# Altium PCB PCB_D1 mini AHT20 BMP150_2022-06-28.pcbdoc
Units mil, origin at the board's own origin, x right, y up, seen from the top; angles counter-clockwise.
Board outline 2302.5 x 2175 mil, 2 copper layers (Top Layer, Bottom Layer); 17 components, 27 nets, 76 pads, 4 vias.
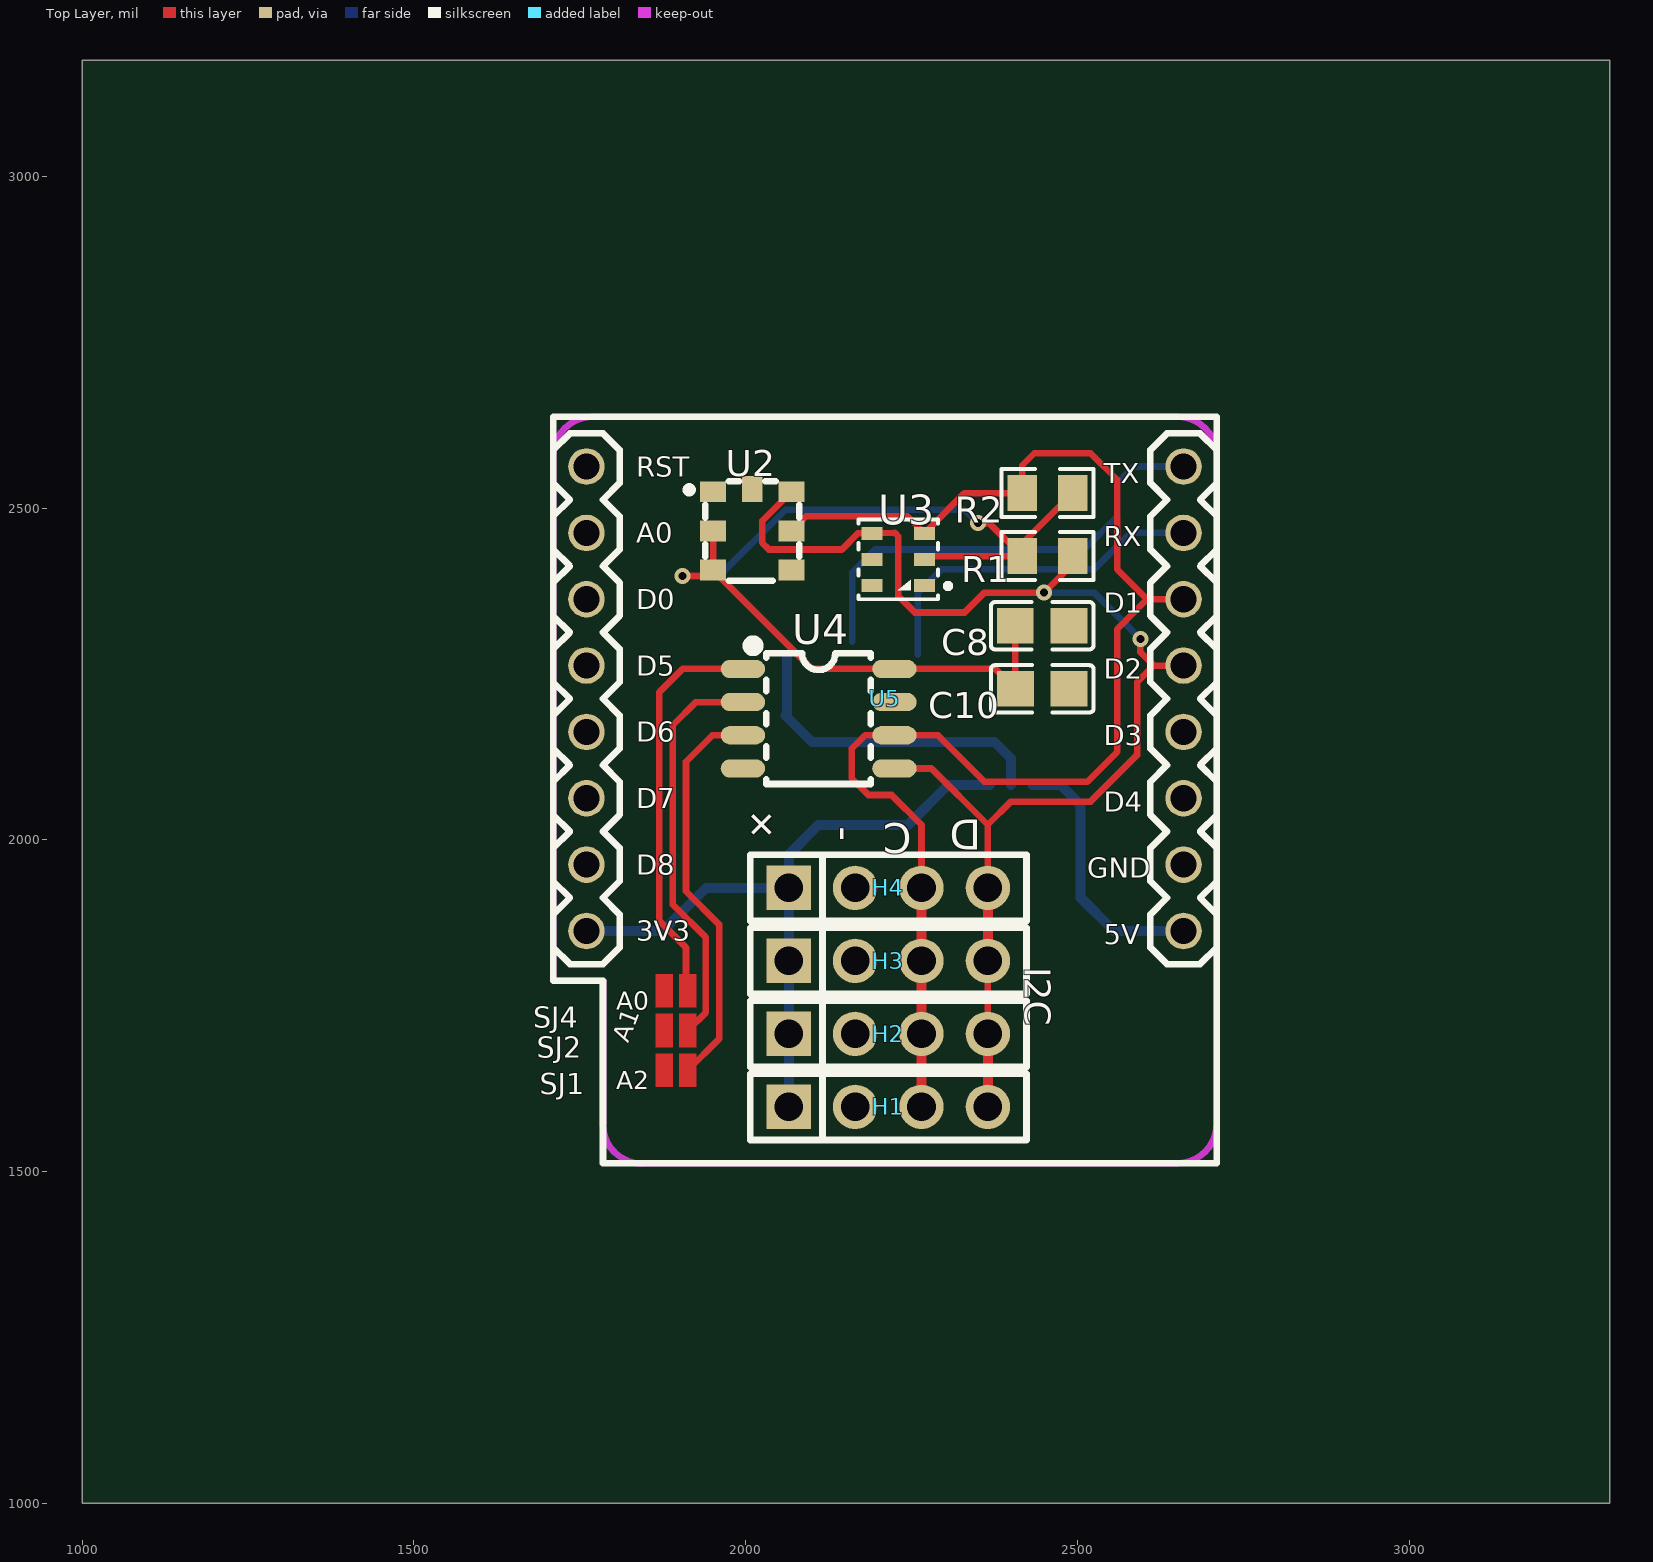
[diagram p0: Top Layer view]
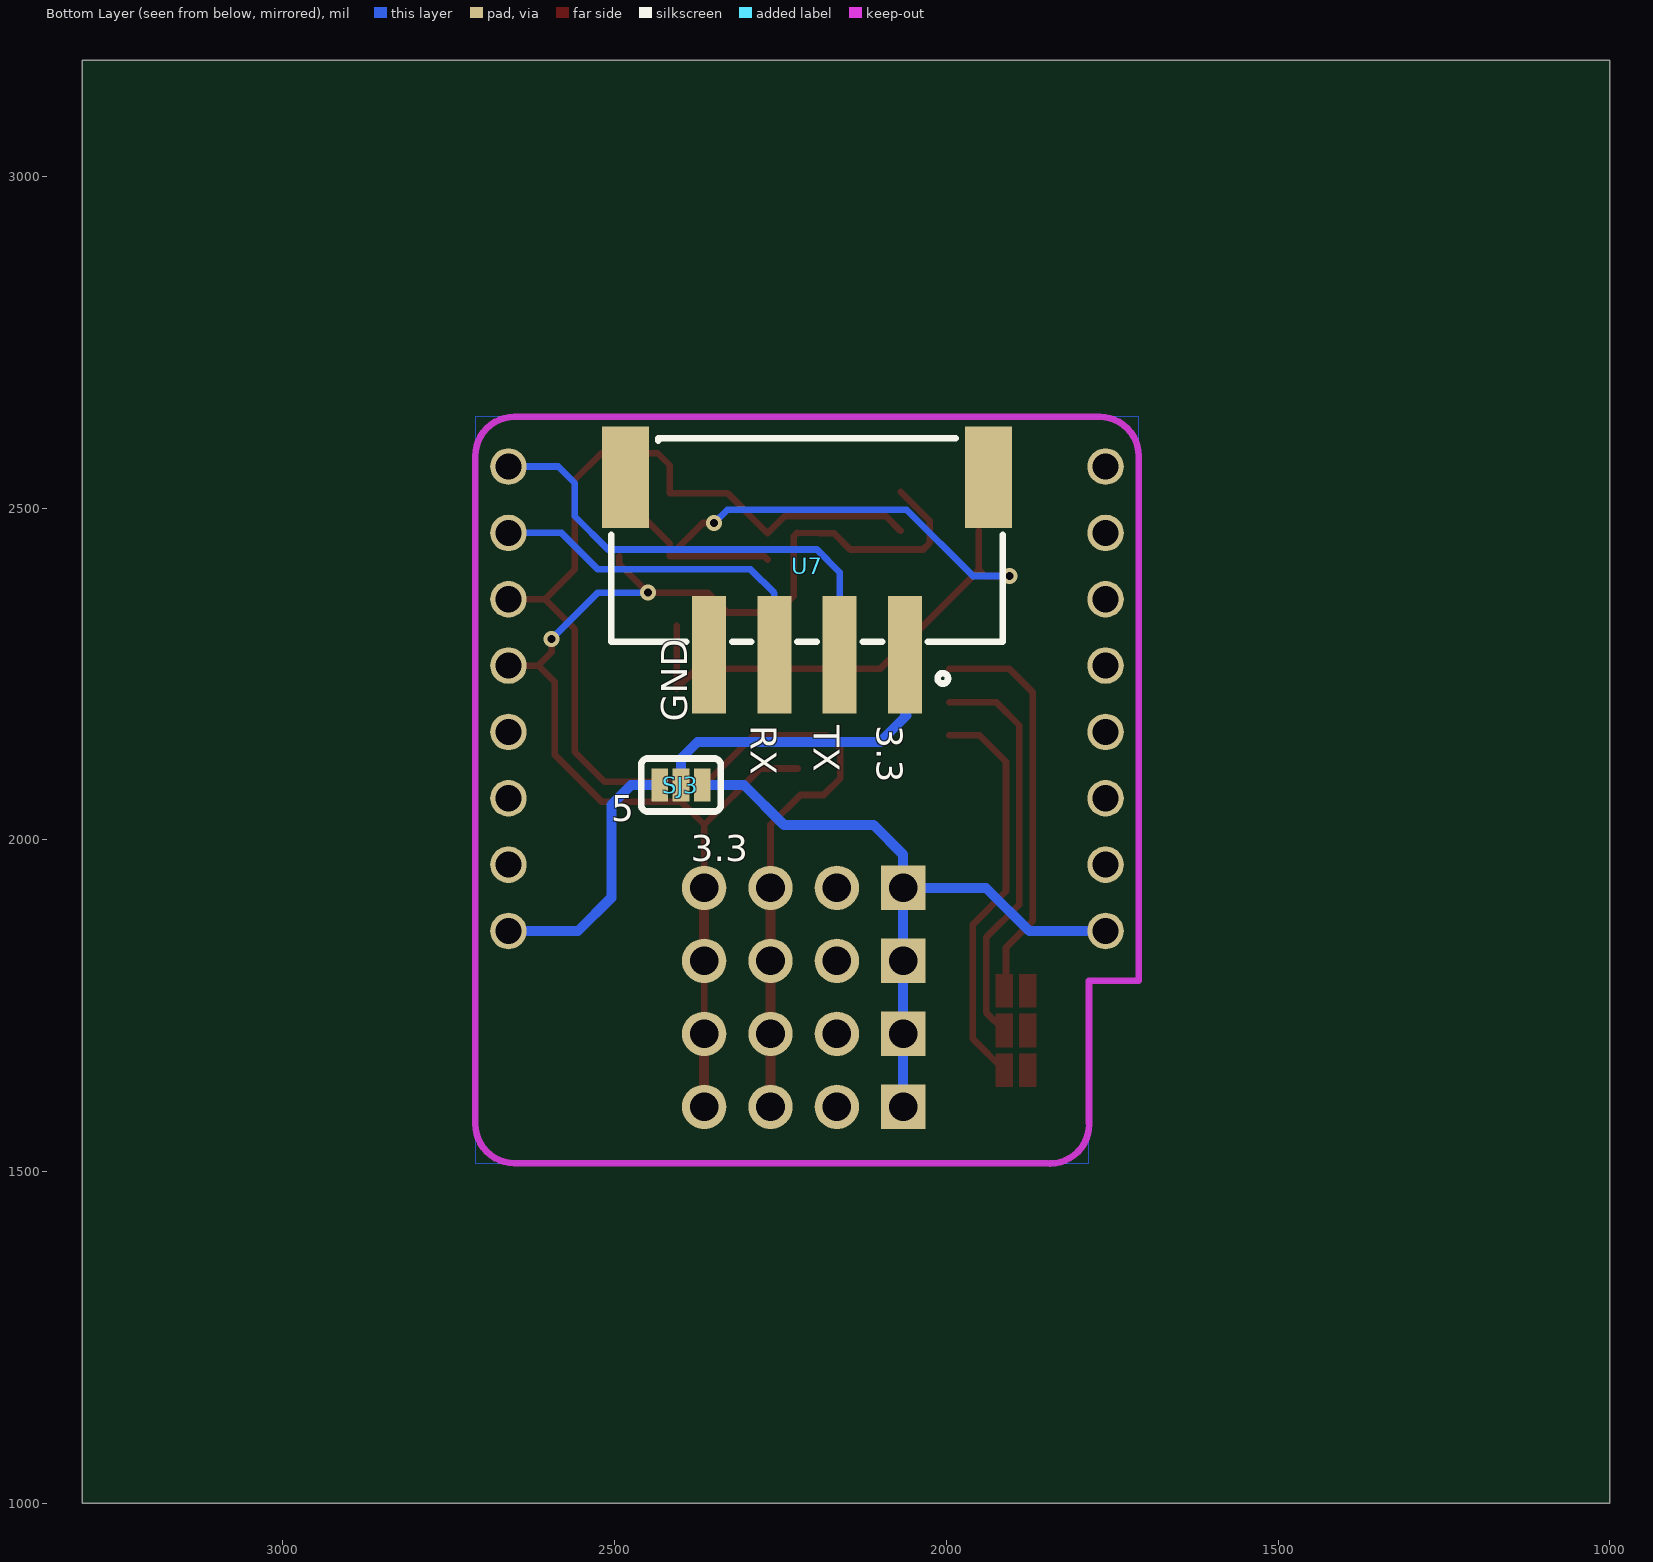
[diagram p1: Bottom Layer view, seen from below]

## Layer stack, top to bottom
Top Layer: signal copper (thickness not stored)
Dielectric: dielectric 12.6, FR-4, Dk 4.8
Bottom Layer: signal copper (thickness not stored)

## Board outline
3302.5,1000 1000,1000 1000,3175 3302.5,3175

## Components (designator, comment, footprint, x,y, rotation, side; value= is the part's Value field where it differs from the comment)
C8 "0.1u" C0805 2447.03,2322.5 r180 top
C10 "0.1u" C0805 2447.03,2227.5 r180 top
H1 "IO_EXT" HDR-TH_4P-P2.54-V-M 2215,1597.5 r0 top
H2 "IO_EXT" HDR-TH_4P-P2.54-V-M 2215,1707.5 r0 top
H3 "IO_EXT" HDR-TH_4P-P2.54-V-M 2215,1817.5 r0 top
H4 "IO_EXT" HDR-TH_4P-P2.54-V-M 2215,1927.5 r0 top
R1 "4.7K" R0805 2455,2427.5 r180 top
R2 "4.7K" R0805 2455,2522.5 r0 top
SJ1 "A2" PAD-JUMPER-2-NO_NO_SILK 1895,1652.5 r0 top
SJ2 "A1" PAD-JUMPER-2-NO_NO_SILK 1895,1712.5 r0 top
SJ3 "5V_IN_Jumpper" PAD-JUMPER-3-NO_YES_SILK 2400,2082.5 r0 bottom
SJ4 "A0" PAD-JUMPER-2-NO_NO_SILK 1895,1772.5 r0 top
U2 "BMP180" LGA-7_L3.8-W3.6-P1.50-BL 2010,2467.5 r270 top
U3 "AHT20_C2757850" SENSOR-SMD_L3.0-W3.0-P1.00-BR 2230,2422.5 r0 top
U4 "AT24C512C-SSHM-T" SOP-8_L5.0-W4.0-P1.27-LS6.2-BL 2110,2182.5 r270 top
U5 "WEMOS-D1-MINI-SHIELD" WEMOS-D1-MINI-SHIELD 2210,2087.5 r0 top
U7 "XH2.54-4PSMD" CONN-SMD_XH2.54-4PSMD 2210,2412.5 r180 bottom

## Footprints (in the part's own frame and the unit in brackets; to place one, negate y for a bottom-side part, rotate by r counter-clockwise, add the part's x,y. Pads: shape width x height; smd on the part's side, far side on the other; paste and mask are expansions set on the pad)
C0805 [mm]
  rect 1.41x1.35 smd: 1(-1.03,0) 2(1.03,0)
  silkscreen extent -1.96,-0.9 1.96,0.9
CONN-SMD_XH2.54-4PSMD [mm]
  rect 1.3x4.5 smd: 1(3.75,-3.4) 2(1.25,-3.4) 3(-1.25,-3.4) 4(-3.75,-3.4)
  rect 1.8x3.9 smd: 5(6.95,3.4) 6(-6.95,3.4)
  silkscreen extent -7.5,-4.5 7.5,4.9
HDR-TH_4P-P2.54-V-M [mm]
  rect 1.7x1.7 hole 1.1: 1(-3.81,0)
  round 1.7 hole 1.1: 2(-1.27,0) 3(1.27,0) 4(3.81,0)
  silkscreen extent -5.29,-1.27 5.29,1.27
LGA-7_L3.8-W3.6-P1.50-BL [mil]
  rect 31.5x39.4 smd: 1(-57,-59) 2(2,-59) 3(61,-59) 4(61,59) 5(2,59) 6(-57,59)
  rect 39.4x31.5 smd: 7(-61,0)
  silkscreen extent -73,-100 77,71
PAD-JUMPER-2-NO_NO_SILK [mil]
  round 0 smd: 1(-17.72,0) 2(17.72,0)
  Top Layer region: -30.22,25 -5.22,25 -5.22,-25 -30.22,-25
  Top Layer region: 5.22,25 30.22,25 30.22,-25 5.22,-25
PAD-JUMPER-3-NO_YES_SILK [mil]
  rect 25x50 smd: 1(32,0) 2(0,0) 3(-32,0)
  silkscreen extent -60,-40 60,40
R0805 [mil]
  rect 44.59x54.21 smd: 1(-38.04,0) 2(38.04,0)
  silkscreen extent -69,-36 69,36
SENSOR-SMD_L3.0-W3.0-P1.00-BR [mm]
  rect 0.8x0.5 smd: 1(1,-1) 2(1,0) 3(1,1) 4(-1,1) 5(-1,0) 6(-1,-1)
  silkscreen extent -1.52,-1.52 2.01,1.52
SOP-8_L5.0-W4.0-P1.27-LS6.2-BL [mm]
  oval 0.7x1.7 smd: 1(-1.905,-2.9) 2(-0.635,-2.9) 3(0.635,-2.9) 4(1.905,-2.9) 5(1.905,2.9) 6(0.635,2.9) 7(-0.635,2.9) 8(-1.905,2.9)
  silkscreen extent -2.99,-2.71 2.5,2
WEMOS-D1-MINI-SHIELD [mil]
  round 55.1 hole 39.4: JP1.1(-450,475) JP1.2(-450,375) JP1.3(-450,275) JP1.4(-450,175) JP1.5(-450,75) JP1.6(-450,-25) JP1.7(-450,-125) JP1.8(-450,-225) JP2.1(450,475) JP2.2(450,375) JP2.3(450,275) JP2.4(450,175) JP2.5(450,75) JP2.6(450,-25) JP2.7(450,-125) JP2.8(450,-225)
  silkscreen extent -500,-575 500,550

## Via types
v1: diameter 24, hole 12, Top Layer to Bottom Layer, tented both sides, 4 vias

## Nets (pads, with @x,y where several pads share a name; then routed paths per layer and width w, separated by ;. In a path a pad name is that pad's centre, name@x,y a point inside that pad or via, vN(x,y) a via of type N, cw(c..) or ccw(c..) an arc to the next point about the centre after c; other vN are vias at no path point)
3.3V: C8.2 C10.2 H1.1 H2.1 H3.1 H4.1 R1.2 R2.2 SJ3.3 U2.2 U2.3 U3.2 U4.8 U5.JP1.8 | length 2645.3
  Top Layer w10: v1(1905,2397.5) 1942,2397.5 U2.3 ; U2.2 U2.3 ; U3.2 2274.37,2427.5 R1.2 ; v1(2350,2477.5) 2366.96,2477.5 R1.2 ; C8.2 C10.2 2376.48,2257.5 U4.8 2100,2257.5 U2.3 ; R2.2 2416.96,2446.42 R1.2
  Bottom Layer w10: v1(1905,2397.5) 1960,2397.5 2060,2497.5 2330,2497.5 v1(2350,2477.5)
  Bottom Layer w15: U5.JP1.8 1875,1862.5 1940,1927.5 H4.1 ; H1.1@2065,1602.5 2065,1712.5 H3.1 H4.1 ; SJ3.3 2305,2082.5 2245,2022.5 2110,2022.5 2065,1977.5 H4.1
A0: SJ4.2 U4.1 | length 608
  Top Layer w10: SJ4.2 1910,1775.22 1910,1837.5 1870,1877.5 1870,2222.5 1905,2257.5 U4.1
A1: SJ2.2 U4.2 | length 612.3
  Top Layer w10: SJ2.2 1940,1739.8 1940,1852.5 1890,1902.5 1890,2172.5 1925,2207.5 U4.2
A2: SJ1.2 U4.3 | length 607.7
  Top Layer w10: SJ1.2 1960,1699.8 1960,1872.5 1910,1922.5 1910,2117.5 1950,2157.5 U4.3
GND: C8.1 C10.1 H1.2 H2.2 H3.2 H4.2 SJ1.1 SJ2.1 SJ4.1 U2.7 U3.5 U4.4 U4.7 U5.JP2.7 U7.4
S$151: 
SCL: H1.3 H2.3 H3.3 H4.3 R2.1 U2.5 U3.3 U4.6 U5.JP2.3 | length 2214.1
  Top Layer w10: U2.5 2091,2487.5 2243.74,2487.5 U3.3 2330,2522.5 R2.1 2416.96,2564.46 2435,2582.5 2520,2582.5 2560,2542.5 2560,2407.5 2605,2362.5 ; U4.6 2290,2157.5 2360,2087.5 2515,2087.5 2560,2132.5 2560,2317.5 2605,2362.5 ; U4.6 2180,2157.5 2160,2137.5 2160,2092.5 2185,2067.5 2220,2067.5 2265,2022.5 H4.3 ; 2605,2362.5 U5.JP2.3 2605,2362.5
  Top Layer w15: H1.3@2265,1602.5 2265,1712.5 H3.3 H4.3
SDA: H1.4 H2.4 H3.4 H4.4 R1.1 U2.6 U3.4 U4.5 U5.JP2.4 | length 2139.3
  Top Layer w10: U2.6 2025,2480.5 2025,2447.5 2035,2437.5 2145,2437.5 2169.37,2461.87 U3.4 ; U3.4 2225,2462.5 2230,2457.5 2230,2367.5 2255,2342.5 2330,2342.5 2360,2372.5 v1(2450,2372.5) 2493.04,2415.54 R1.1 ; U4.5 2280,2107.5 2365,2022.5 ; H2.4@2365,1712.5 H3.4 ; v1(2595,2302.5) 2595,2282.5 2615,2262.5 ; 2365,2022.5 2400,2057.5 2520,2057.5 2590,2127.5 2590,2237.5 2615,2262.5 ; 2365,2022.5 H4.4 2365,2022.5 ; 2615,2262.5 U5.JP2.4 2615,2262.5
  Top Layer w15: H1.4@2365,1602.5 H2.4@2365,1712.5 ; H3.4 H4.4
  Bottom Layer w10: v1(2450,2372.5) 2525,2372.5 v1(2595,2302.5)
U2_1: U2.1
U2_4: U2.4
U3_1: U3.1
U3_6: U3.6
U5_JP1.1: U5.JP1.1
U5_JP1.2: U5.JP1.2
U5_JP1.3: U5.JP1.3
U5_JP1.4: U5.JP1.4
U5_JP1.5: U5.JP1.5
U5_JP1.6: U5.JP1.6
U5_JP1.7: U5.JP1.7
U5_JP2.1: U5.JP2.1 U7.2 | length 699.1
  Bottom Layer w10: U7.2@2160.8,2298.6 2160.8,2403.3 2195,2437.5 2510,2437.5 2560,2487.5 2560,2537.5 2585,2562.5 U5.JP2.1
U5_JP2.2: U5.JP2.2 U7.3 | length 531.5
  Bottom Layer w10: U7.3 2259.2,2371.7 2295,2407.5 2525,2407.5 2580,2462.5 U5.JP2.2
U5_JP2.5: U5.JP2.5
U5_JP2.6: U5.JP2.6
U5_JP2.8: SJ3.1 U5.JP2.8 | length 401.1
  Bottom Layer w15: SJ3.1 2475,2082.5 2505,2052.5 2505,1912.5 2555,1862.5 U5.JP2.8
U7_5: U7.5
U7_6: U7.6
VOUT: SJ3.2 U7.1 | length 499
  Bottom Layer w15: U7.1 2062.36,2189.86 2060,2187.5 2100,2147.5 2375,2147.5 2400,2122.5 SJ3.2

## Polygon pours and split planes (outlines as drawn)
GND on Top Layer (solid): 1785,1512.5 1785,1787.5 1710,1787.5 1710,2637.5 2710,2637.5 2710,1512.5 1785,1512.5
GND on Bottom Layer (solid): 2710,2637.5 2710,1512.5 1785,1512.5 1785,1787.5 1710,1787.5 1710,2637.5 2710,2637.5

## Keep-outs
Keep-Out Layer:
  lines w10: 1710,2578.44 cw(c1769.05,2578.44) 1769.05,2637.5 ; 1784.68,1571.12 ccw(c1843.74,1571.12) 1843.74,1512.06 ; 2650.94,1512.5 ccw(c2650.94,1571.55) 2710,1571.55 ; 2650.94,2637.5 cw(c2650.94,2578.44) 2710,2578.44

## Silkscreen, mask and mechanical layers (free items; w line width, h text height)
Top Overlay:
  text "D" at 2355,2030 h45 r180
  text "C" at 2250,2025 h45 r180
  text "+" at 2055.91,2018.41 h45 r135
  text "-" at 2162.5,1997.5 h45 r90
  text "I2C" at 2420.32,1807.5 h39.37 r270
  text "A0" at 1805,1743.72 h27.56
  text "A1" at 1822.86,1692.56 h27.56 r69
  text "A2" at 1805,1623.72 h27.56
Bottom Overlay:
  text "GND" at 2390.32,2177.5 h39.37 r270
  text "3.3" at 2104.68,2172.5 h39.37 r90
  text "TX" at 2199.68,2172.5 h39.37 r90
  text "RX" at 2294.68,2172.5 h39.37 r90
  text "5" at 2505,2027.82 h39.37
  text "3.3" at 2385,1967.82 h39.37

## Text inside footprints (layer, text, board x,y; h text height)
U5: Top Overlay "D7" at 1835,2047.5 h30; Top Overlay "D5" at 1835,2247.5 h30; Top Overlay "D8" at 1835,1947.5 h30; Top Overlay "3V3" at 1835,1847.5 h30; Top Overlay "D0" at 1835,2347.5 h30; Top Overlay "A0" at 1835,2447.5 h30; Top Overlay "RST" at 1835,2547.5 h30; Top Overlay "TX" at 2540,2537.5 h30; Top Overlay "RX" at 2540,2442.5 h30; Top Overlay "D1" at 2540,2342.5 h30; Top Overlay "D2" at 2540,2242.5 h30; Top Overlay "D3" at 2540,2142.5 h30; Top Overlay "D4" at 2540,2042.5 h30; Top Overlay "GND" at 2515,1942.5 h30; Top Overlay "5V" at 2540,1842.5 h30; Top Overlay "D6" at 1835,2147.5 h30